# Altium PCB NEW_PCB.pcbdoc
Units mil, origin at the board's own origin, x right, y up, seen from the top; angles counter-clockwise.
Board outline 3322.84 x 5370.08 mil, 2 copper layers (Top Layer, Bottom Layer); 10 components, 20 nets, 27 pads, 98 vias.
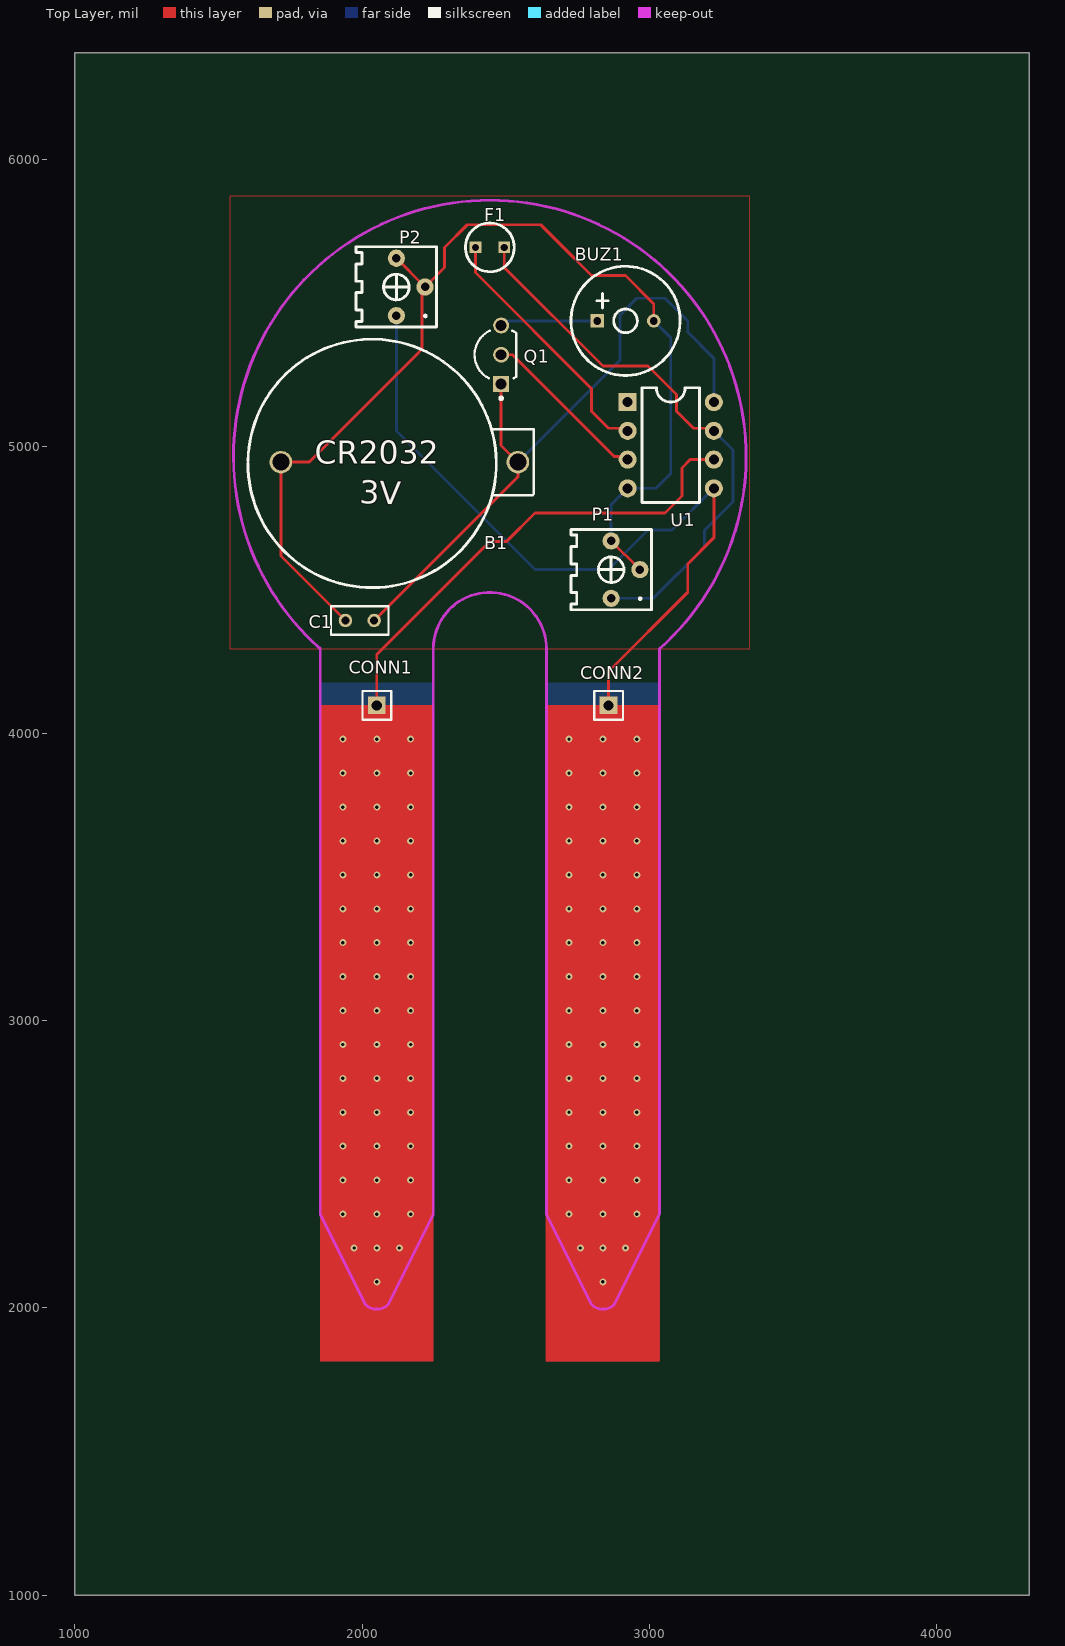
[diagram p0: Top Layer view]
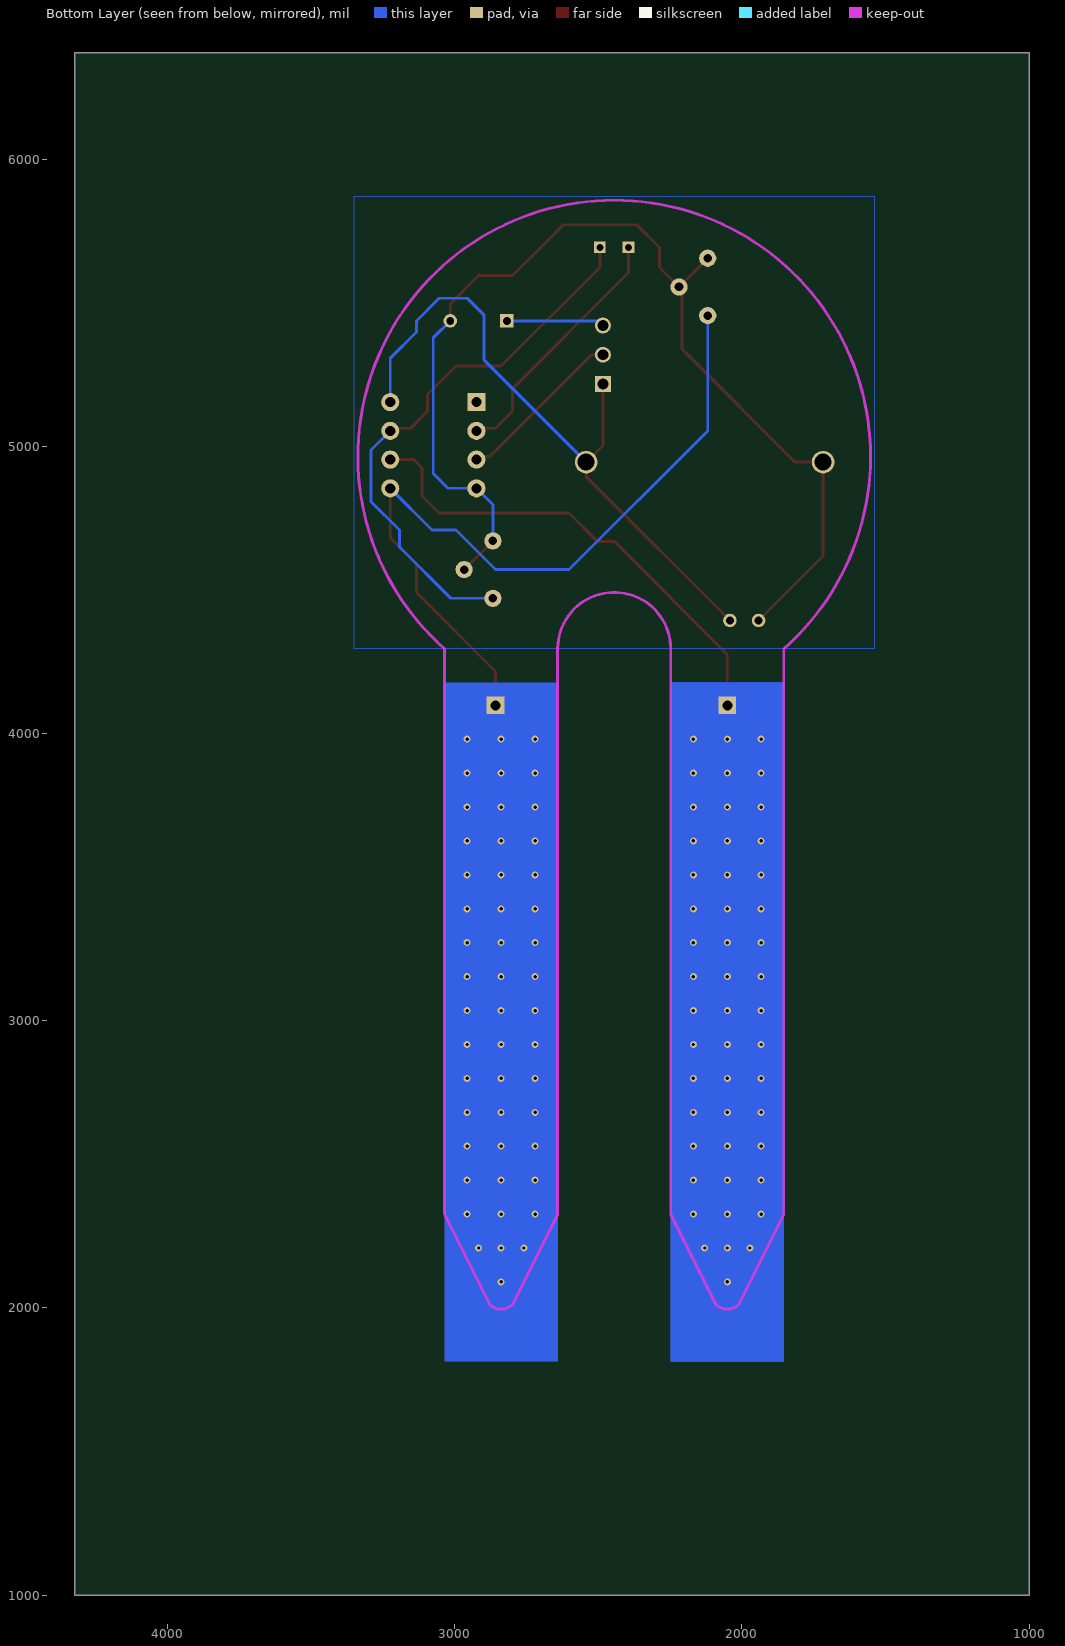
[diagram p1: Bottom Layer view, seen from below]

## Layer stack, top to bottom
Top Layer: signal copper (thickness not stored)
Dielectric: dielectric 12.6, FR-4, Dk 4.8
Bottom Layer: signal copper (thickness not stored)

## Board outline
4322.84,1000 1000,1000 1000,6370.08 4322.84,6370.08

## Components (designator, comment, footprint, x,y, rotation, side; value= is the part's Value field where it differs from the comment)
B1 "BS-2-1" BATTERY-1 2129.92,4944.88 r180 top
BUZ1 "ZL-DCY09605-2705P-5" BUZZER-R9.6-2P-5.0PITCH 2917.32,5437.01 r0 top
C1 "1u" RAD-0.1 1992.13,4393.7 r0 top
CONN1 "Header-Male-2.54_1x1" HDR-1X1/2.54 2051.18,4098.43 r0 top
CONN2 "Header-Male-2.54_1x1" HDR-1X1/2.54 2858.27,4098.43 r0 top
F1 "PHOTORESPDV-P9" PDV-P9XXX 2444.88,5692.91 r180 top
P1 "100k" RES-ADJ_3362P 2917.33,4570.88 r0 top
P2 "100k" RES-ADJ_3362P 2169.33,5555.08 r0 top
Q1 "BC337-40ZL1G" ONSC-TO-92-3-29-11_AM_BL 2484.25,5318.9 r0 top
U1 "ATTINY45-20PU" DIP-8 3074.8,5003.94 r0 top

## Footprints (in the part's own frame and the unit in brackets; to place one, negate y for a bottom-side part, rotate by r counter-clockwise, add the part's x,y. Pads: shape width x height; smd on the part's side, far side on the other; paste and mask are expansions set on the pad)
BATTERY-1 [mm]
  round 2 hole 1.5: 1(-10.477,0) 2(10.477,0)
  silkscreen extent -11.87,-10.87 13.4,11.09
BUZZER-R9.6-2P-5.0PITCH [mm]
  rect 1.2x1.2 hole 0.7: 1(-2.5,0)
  round 1.2 hole 0.7: 2(2.5,0)
  silkscreen extent -4.82,-4.82 4.83,4.83
DIP-8 [mil]
  rect 63x63 hole 35: 1(-150,150)
  round 63 hole 35: 2(-150,50) 3(-150,-50) 4(-150,-150) 5(150,-150) 6(150,-50) 7(150,50) 8(150,150)
  silkscreen extent -100,-200 100,200
HDR-1X1/2.54 [mil]
  rect 62x62 hole 35: 1(0,0)
  silkscreen extent -50,-50 50,50
ONSC-TO-92-3-29-11_AM_BL [mil]
  rect 55.5x55.5 hole 38: 1(0,-102)
  round 55.5 hole 38: 2(0,0) 3(0,102)
  silkscreen extent -92,-157 53,84
PDV-P9XXX [mil]
  rect 40.7x40.7 hole 25: 1(-50.01,0.01) 2(49.99,0.01)
  silkscreen extent -85,-85 85,85
RAD-0.1 [mil]
  round 47 hole 28: 1(-49.99,-0.01) 2(50.01,-0.01)
  silkscreen extent -100,-50 100,50
RES-ADJ_3362P [mil]
  round 60 hole 30: 1(-50,100) 2(50,0) 3(-50,-100)
  silkscreen extent -190,-140 90,140

## Via types
v1: diameter 24.4, hole 12, Top Layer to Bottom Layer, 98 vias

## Nets (pads, with @x,y where several pads share a name; then routed paths per layer and width w, separated by ;. In a path a pad name is that pad's centre, name@x,y a point inside that pad or via, vN(x,y) a via of type N, cw(c..) or ccw(c..) an arc to the next point about the centre after c; other vN are vias at no path point)
BUZ1_1: BUZ1.1 Q1.3 | length 341.3
  Bottom Layer w10: Q1.3 2500.36,5437.01 BUZ1.1
GND: B1.2 BUZ1.2 C1.1 P1.1 P1.2 P2.1 P2.2 U1.4 | length 3836.7
  Top Layer w10: C1.1 1717.42,4618.41 B1.2 1814.96,4944.89 2188.98,5318.9 2208.66,5338.58 2208.66,5544.41 P2.2 ; P2.1 P2.2 ; P1.1 P1.2 ; BUZ1.2 3015.74,5496.07 2917.32,5594.49 2799.21,5594.49 2681.1,5712.6 2622.05,5771.65 2366.14,5771.65 2287.4,5692.91 2287.4,5623.15 P2.2
  Bottom Layer w10: P1.1 2867.33,4796.47 U1.4 3023.23,4853.94 3074.8,4905.51 3074.8,5377.94 BUZ1.2
S$35: 
S$37: 
S$239: 
S$261: 
S$263: 
S$265: 
S$267: 
S$271: 
S$273: 
S$275: 
S$277: 
U1_1: U1.1
U1_2: F1.2 U1.2 | length 892.1
  Top Layer w10: F1.2 2394.88,5605.12 2799.21,5200.79 2799.21,5122.05 2858.27,5062.99 2915.74,5062.99 U1.2
U1_3: Q1.2 U1.3 | length 591.7
  Top Layer w10: Q1.2 2523.62,5318.9 2877.95,4964.57 2914.17,4964.57 U1.3
U1_5: CONN2.1 P2.3 U1.5 | length 2720.3
  Top Layer w10: CONN2.1@2858.23,4109.58 2858.23,4216.58 3133.83,4492.18 3133.83,4590.58 3224.83,4681.48 U1.5@3224.83,4853.98
  Bottom Layer w10: P2.3 2119.33,5053.9 2602.36,4570.87 2858.27,4570.87 2996.06,4708.66 3079.53,4708.66 U1.5
U1_6: CONN1.1 U1.6 | length 1678.3
  Top Layer w10: CONN1.1@2051.23,4109.58 2051.23,4275.58 2444.93,4669.28 2503.93,4669.28 2602.33,4767.68 3055.13,4767.68 3114.13,4826.78 3114.13,4925.18 3142.93,4953.98 U1.6@3224.83,4953.98
U1_7: F1.1 P1.3 U1.7 | length 1942.3
  Top Layer w10: F1.1 2494.88,5623.23 2838.58,5279.53 2996.06,5279.53 3094.49,5181.1 3094.49,5122.05 3153.54,5062.99 3215.74,5062.99 U1.7
  Bottom Layer w10: P1.3 3014.18,4470.88 3192.91,4649.61 3192.91,4708.66 3291.34,4807.09 3291.34,4987.4 U1.7
VCC: B1.1 C1.2 Q1.1 U1.8 | length 2327.5
  Top Layer w10: C1.2 2542.42,4893.99 B1.1 2484.25,5003.06 Q1.1
  Bottom Layer w10: B1.1 2897.64,5300.1 2897.64,5456.69 2956.69,5515.75 3055.12,5515.75 3133.86,5437.01 3133.86,5397.64 3224.8,5306.7 U1.8
copper on no net:
  other v1: 2051.18,2090.56 2838.58,2090.56 1972.44,2208.67 2051.18,2208.67 2129.92,2208.67 2759.84,2208.67 2838.58,2208.67 2917.32,2208.67 1933.07,2326.78 2051.18,2326.78 2169.29,2326.78 2720.47,2326.78 2838.58,2326.78 2956.69,2326.78 1933.07,2444.89 2051.18,2444.89 2169.29,2444.89 2720.47,2444.89 2838.58,2444.89 2956.69,2444.89 1933.07,2563 2051.18,2563 2169.29,2563 2720.47,2563 2838.58,2563 2956.69,2563 1933.07,2681.11 2051.18,2681.11 2169.29,2681.11 2720.47,2681.11 2838.58,2681.11 2956.69,2681.11 1933.07,2799.22 2051.18,2799.22 2169.29,2799.22 2720.47,2799.22 2838.58,2799.22 2956.69,2799.22 1933.07,2917.33 2051.18,2917.33 2169.29,2917.33 2720.47,2917.33 2838.58,2917.33 2956.69,2917.33 1933.07,3035.44 2051.18,3035.44 2169.29,3035.44 2720.47,3035.44 2838.58,3035.44 2956.69,3035.44 1933.07,3153.55 2051.18,3153.55 2169.29,3153.55 2720.47,3153.55 2838.58,3153.55 2956.69,3153.55 1933.07,3271.66 2051.18,3271.66 2169.29,3271.66 2720.47,3271.66 2838.58,3271.66 2956.69,3271.66 1933.07,3389.77 2051.18,3389.77 2169.29,3389.77 2720.47,3389.77 2838.58,3389.77 2956.69,3389.77 1933.07,3507.88 2051.18,3507.88 2169.29,3507.88 2720.47,3507.88 2838.58,3507.88 2956.69,3507.88 1933.07,3625.99 2051.18,3625.99 2169.29,3625.99 2720.47,3625.99 2838.58,3625.99 2956.69,3625.99 1933.07,3744.1 2051.18,3744.1 2169.29,3744.1 2720.47,3744.1 2838.58,3744.1 2956.69,3744.1 1933.07,3862.21 2051.18,3862.21 2169.29,3862.21 2720.47,3862.21 2838.58,3862.21 2956.69,3862.21 1933.07,3980.32 2051.18,3980.32 2169.29,3980.32 2720.47,3980.32 2838.58,3980.32 2956.69,3980.32

## Polygon pours and split planes (outlines as drawn)
GND on Bottom Layer (solid): 1854.33,1814.96 1854.33,4177.17 2248.03,4177.17 2248.03,1814.96
GND on Bottom Layer (solid): 1539.37,4295.28 3350.39,4295.28 3350.39,5870.08 1539.37,5870.08 1539.37,5732.28
GND on Top Layer (solid): 2641.73,4098.43 3035.43,4098.43 3035.43,1814.96 2641.73,1814.96 2641.73,3940.95
GND on Top Layer (solid): 1539.37,4295.28 3350.39,4295.28 3350.39,5870.08 1539.37,5870.08

## Keep-outs
Keep-Out Layer:
  lines w10: 1854.33,4295.28 cw(c2444.88,4964.57) 3035.43,4295.28 ; 2011.81,2011.81 ccw(c2051.18,2051.18) 2090.55,2011.81 ; 2248.03,4295.28 cw(c2444.88,4294.83) 2641.73,4295.28 ; 2799.21,2011.81 ccw(c2838.58,2051.18) 2877.95,2011.81

## Other copper
Top Layer:
  region: 1854.33,4098.43 2248.03,4098.43 2248.03,1814.96 1854.33,1814.96
  region: 2641.73,4098.43 3035.43,4098.43 3035.43,1814.96 2641.73,1814.96
Bottom Layer:
  region: 1854.33,4177.17 2248.03,4177.17 2248.03,2641.73 2248.03,1814.96 1854.33,1814.96 1854.33,2090.55
  region: 2641.73,4177.17 3035.43,4177.17 3035.43,1814.96 2641.73,1814.96 2641.73,2838.58

## Silkscreen, mask and mechanical layers (free items; w line width, h text height)
Top Overlay:
  text "CR2032" at 1834.67,4940.03 h80
  text "3V" at 1990.76,4802.19 h80 r358
Top Solder:
  region: 1578.74,4098.43 3153.54,4098.43 3271.65,3153.54 3153.54,1657.48 1578.74,1736.22
Bottom Solder:
  region: 1578.74,4098.43 3822.84,4098.43 3507.87,1500 1500,1618.11
Document:
  lines w0.1: 2660.42,3684.04 2662.42,3686.04